# EAGLE board SparkFun_Analog_MEMS_Microphone_Breakout_SPH8878LR5H-1-Panel (EAGLE 9.6.2), part 1 of 7
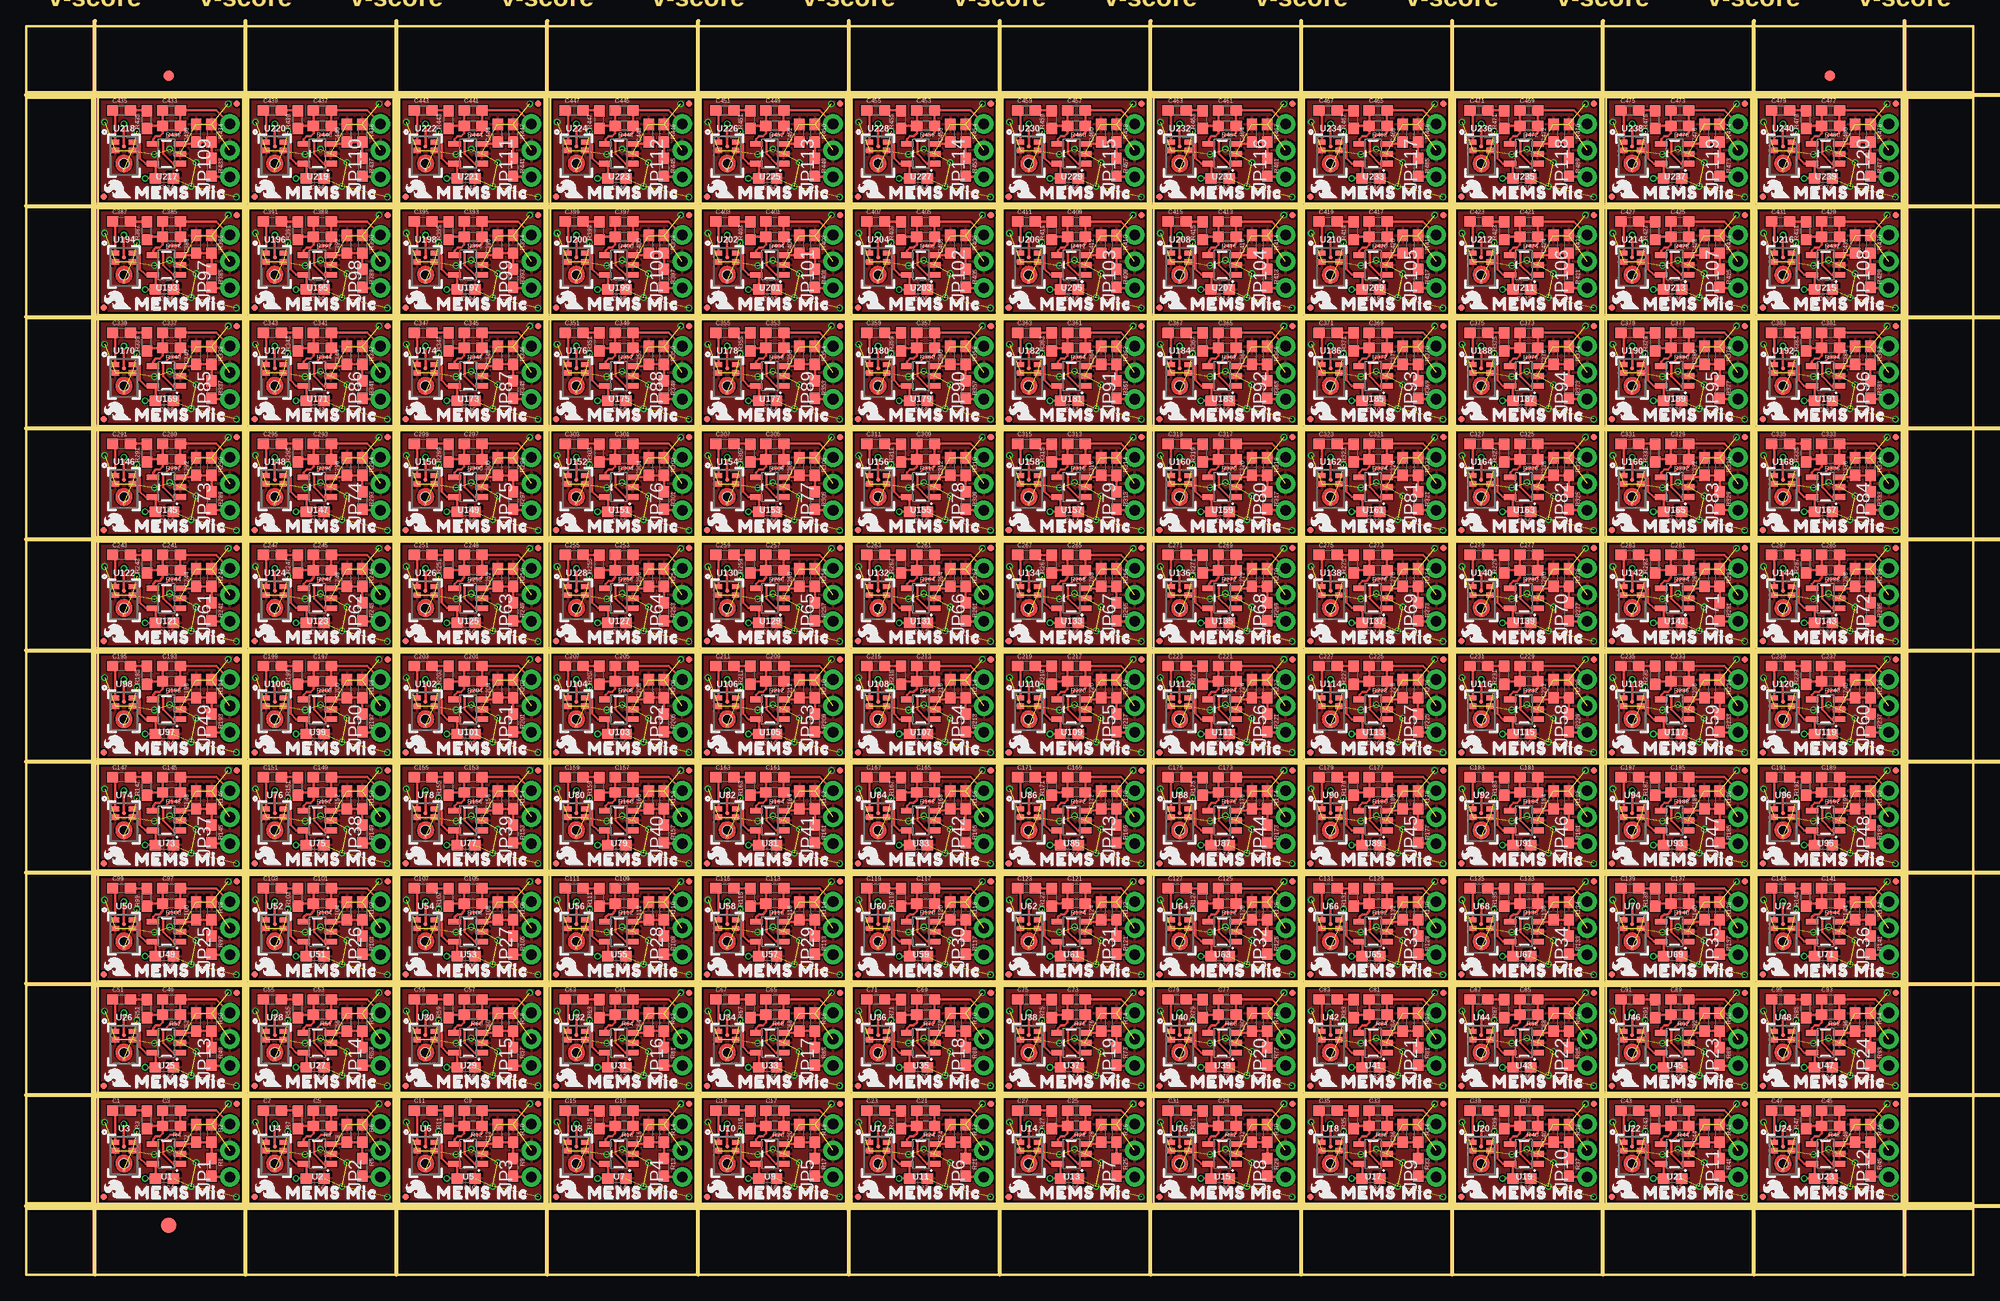
[diagram p0: board, top side]
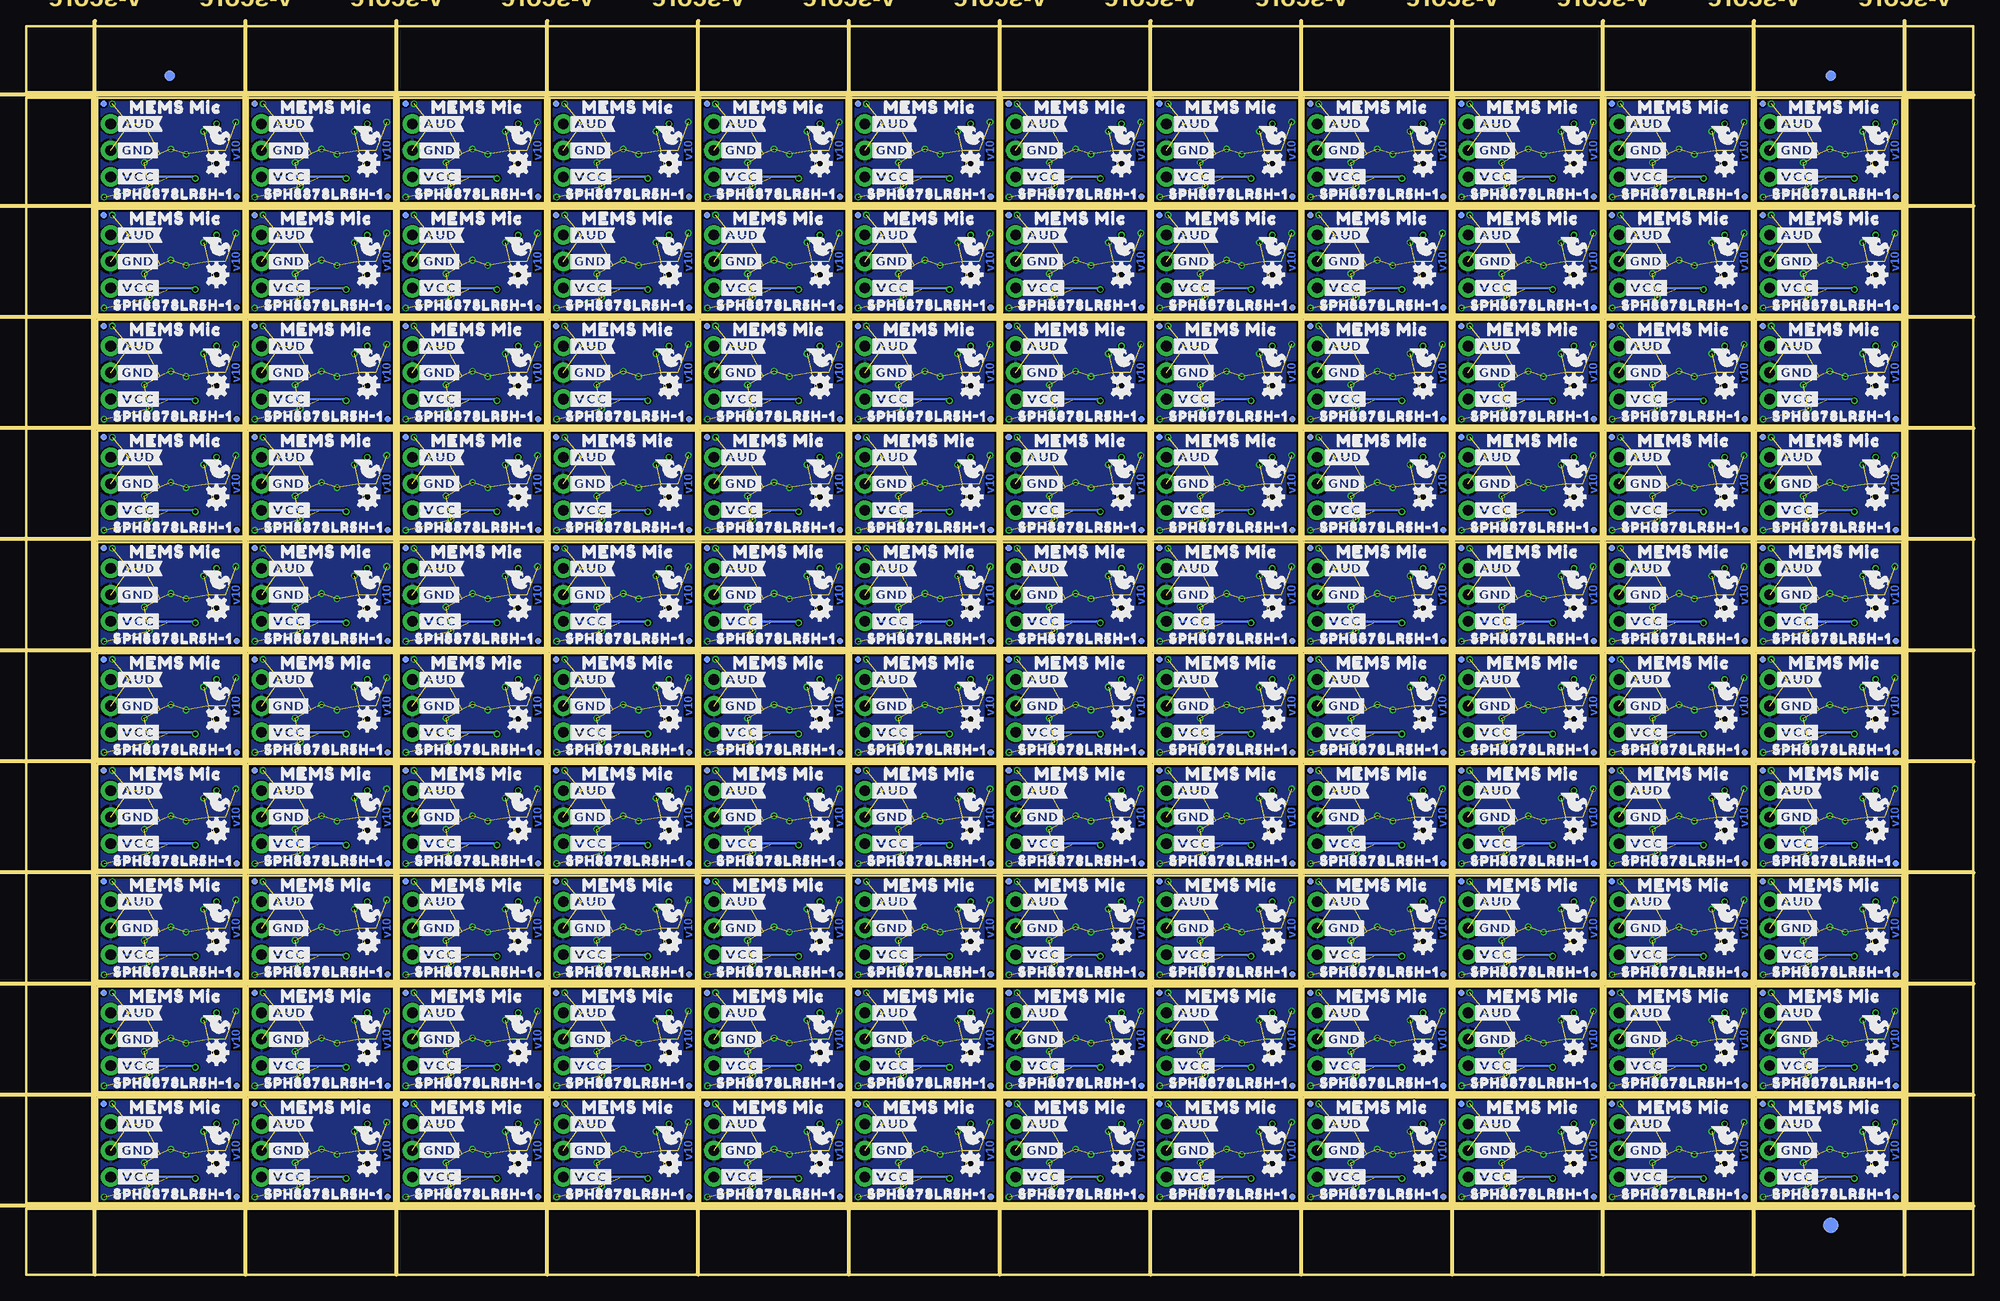
[diagram p1: board, bottom side, seen from below]

Size 186.94 x 119.89 mm. Coordinates in mm from the lower left corner, seen from the top.
Outline: 496 segments
Copper layers (1*16): Top 0.035mm / dielectric 1.5mm / Bottom 0.035mm
Design rules "SparkFun_Analog_MEMS_Microphone_Breakout_SPH8878LR5H-1": minimum track width 5mil, minimum drill 0.3mm, track to track 5mil, track to pad 5mil, pad to pad 5mil, via to via 5mil, smd to smd 5mil, copper to edge 7mil, drill to drill 7mil, minimum pad ring 5mil, minimum via ring 5mil, stop-mask expansion 2.5mil, vias tented up to drill 25mil, thermal gap 10mil
Milling: 24 lines

## Footprints (pad centres in the part's own frame; a part is rotated, then mirrored left to right if it is on the bottom)
0603 = smd 1.1 x 1: 1 -0.85,0; 2 0.85,0
FIDUCIAL-1X2 = smd 1 x 1: 1 0,0
FIDUCIAL-1.5X3 = smd 1.5 x 1.5: 1 0,0
FIDUCIAL-MICRO = smd 0.635 x 0.635: 1 0,0
1X03_NO_SILK = drill 1.016 pad 1.88: 1 0,0; 2 2.54,0; 3 5.08,0
TP_15TH = drill 0.381 pad 0.61: 1 0,0
SOT23-5 = smd 0.55 x 1.2: 1 -0.95,-1.3; 2 0,-1.3; 3 0.95,-1.3; 4 0.95,1.3; 5 -0.95,1.3
SPH8878LR5H-1 = smd 0.685 x 0.482: 1 -0.818,2.055; 5 0.818,2.055 | smd 0.685 x 0.523: 2 -0.818,1.252; 4 0.818,1.252 | smd 0.25 x 0.25: 3 -0.01,-0.66 | smd 0.4 x 0.4: 6 0,1.663 | hole 0.9: 0,0

## Placement (x,y rotation side)
C1  4.7uF  [0603]  9.17,15.77 0 top
C2  1.0uF  [0603]  16.33,13.59 90 top
C3  27pF  [0603]  13.97,15.77 0 top
C4  0.1uF  [0603]  13.28,9.25 180 top
C5  27pF  [0603]  28.45,15.77 0 top
C6  0.1uF  [0603]  27.76,9.25 180 top
C7  4.7uF  [0603]  23.65,15.77 0 top
C8  1.0uF  [0603]  30.81,13.59 90 top
C9  27pF  [0603]  42.93,15.77 0 top
C10  0.1uF  [0603]  42.24,9.25 180 top
C11  4.7uF  [0603]  38.13,15.77 0 top
C12  1.0uF  [0603]  45.29,13.59 90 top
C13  27pF  [0603]  57.4,15.77 0 top
C14  0.1uF  [0603]  56.72,9.25 180 top
C15  4.7uF  [0603]  52.6,15.77 0 top
C16  1.0uF  [0603]  59.77,13.59 90 top
C17  27pF  [0603]  71.88,15.77 0 top
C18  0.1uF  [0603]  71.2,9.25 180 top
C19  4.7uF  [0603]  67.08,15.77 0 top
C20  1.0uF  [0603]  74.24,13.59 90 top
C21  27pF  [0603]  86.36,15.77 0 top
C22  0.1uF  [0603]  85.67,9.25 180 top
C23  4.7uF  [0603]  81.56,15.77 0 top
C24  1.0uF  [0603]  88.72,13.59 90 top
C25  27pF  [0603]  100.84,15.77 0 top
C26  0.1uF  [0603]  100.15,9.25 180 top
C27  4.7uF  [0603]  96.04,15.77 0 top
C28  1.0uF  [0603]  103.2,13.59 90 top
C29  27pF  [0603]  115.32,15.77 0 top
C30  0.1uF  [0603]  114.63,9.25 180 top
C31  4.7uF  [0603]  110.52,15.77 0 top
C32  1.0uF  [0603]  117.68,13.59 90 top
C33  27pF  [0603]  129.79,15.77 0 top
C34  0.1uF  [0603]  129.11,9.25 180 top
C35  4.7uF  [0603]  124.99,15.77 0 top
C36  1.0uF  [0603]  132.16,13.59 90 top
C37  27pF  [0603]  144.27,15.77 0 top
C38  0.1uF  [0603]  143.59,9.25 180 top
C39  4.7uF  [0603]  139.47,15.77 0 top
C40  1.0uF  [0603]  146.63,13.59 90 top
C41  27pF  [0603]  158.75,15.77 0 top
C42  0.1uF  [0603]  158.06,9.25 180 top
C43  4.7uF  [0603]  153.95,15.77 0 top
C44  1.0uF  [0603]  161.11,13.59 90 top
C45  27pF  [0603]  173.23,15.77 0 top
C46  0.1uF  [0603]  172.54,9.25 180 top
C47  4.7uF  [0603]  168.43,15.77 0 top
C48  1.0uF  [0603]  175.59,13.59 90 top
C49  27pF  [0603]  13.97,26.44 0 top
C50  0.1uF  [0603]  13.28,19.91 180 top
C51  4.7uF  [0603]  9.17,26.44 0 top
C52  1.0uF  [0603]  16.33,24.26 90 top
C53  27pF  [0603]  28.45,26.44 0 top
C54  0.1uF  [0603]  27.76,19.91 180 top
C55  4.7uF  [0603]  23.65,26.44 0 top
C56  1.0uF  [0603]  30.81,24.26 90 top
C57  27pF  [0603]  42.93,26.44 0 top
C58  0.1uF  [0603]  42.24,19.91 180 top
C59  4.7uF  [0603]  38.13,26.44 0 top
C60  1.0uF  [0603]  45.29,24.26 90 top
C61  27pF  [0603]  57.4,26.44 0 top
C62  0.1uF  [0603]  56.72,19.91 180 top
C63  4.7uF  [0603]  52.6,26.44 0 top
C64  1.0uF  [0603]  59.77,24.26 90 top
C65  27pF  [0603]  71.88,26.44 0 top
C66  0.1uF  [0603]  71.2,19.91 180 top
C67  4.7uF  [0603]  67.08,26.44 0 top
C68  1.0uF  [0603]  74.24,24.26 90 top
C69  27pF  [0603]  86.36,26.44 0 top
C70  0.1uF  [0603]  85.67,19.91 180 top
C71  4.7uF  [0603]  81.56,26.44 0 top
C72  1.0uF  [0603]  88.72,24.26 90 top
C73  27pF  [0603]  100.84,26.44 0 top
C74  0.1uF  [0603]  100.15,19.91 180 top
C75  4.7uF  [0603]  96.04,26.44 0 top
C76  1.0uF  [0603]  103.2,24.26 90 top
C77  27pF  [0603]  115.32,26.44 0 top
C78  0.1uF  [0603]  114.63,19.91 180 top
C79  4.7uF  [0603]  110.52,26.44 0 top
C80  1.0uF  [0603]  117.68,24.26 90 top
C81  27pF  [0603]  129.79,26.44 0 top
C82  0.1uF  [0603]  129.11,19.91 180 top
C83  4.7uF  [0603]  124.99,26.44 0 top
C84  1.0uF  [0603]  132.16,24.26 90 top
C85  27pF  [0603]  144.27,26.44 0 top
C86  0.1uF  [0603]  143.59,19.91 180 top
C87  4.7uF  [0603]  139.47,26.44 0 top
C88  1.0uF  [0603]  146.63,24.26 90 top
C89  27pF  [0603]  158.75,26.44 0 top
C90  0.1uF  [0603]  158.06,19.91 180 top
C91  4.7uF  [0603]  153.95,26.44 0 top
C92  1.0uF  [0603]  161.11,24.26 90 top
C93  27pF  [0603]  173.23,26.44 0 top
C94  0.1uF  [0603]  172.54,19.91 180 top
C95  4.7uF  [0603]  168.43,26.44 0 top
C96  1.0uF  [0603]  175.59,24.26 90 top
C97  27pF  [0603]  13.97,37.11 0 top
C98  0.1uF  [0603]  13.28,30.58 180 top
C99  4.7uF  [0603]  9.17,37.11 0 top
C100  1.0uF  [0603]  16.33,34.92 90 top
C101  27pF  [0603]  28.45,37.11 0 top
C102  0.1uF  [0603]  27.76,30.58 180 top
C103  4.7uF  [0603]  23.65,37.11 0 top
C104  1.0uF  [0603]  30.81,34.92 90 top
C105  27pF  [0603]  42.93,37.11 0 top
C106  0.1uF  [0603]  42.24,30.58 180 top
C107  4.7uF  [0603]  38.13,37.11 0 top
C108  1.0uF  [0603]  45.29,34.92 90 top
C109  27pF  [0603]  57.4,37.11 0 top
C110  0.1uF  [0603]  56.72,30.58 180 top
C111  4.7uF  [0603]  52.6,37.11 0 top
C112  1.0uF  [0603]  59.77,34.92 90 top
C113  27pF  [0603]  71.88,37.11 0 top
C114  0.1uF  [0603]  71.2,30.58 180 top
C115  4.7uF  [0603]  67.08,37.11 0 top
C116  1.0uF  [0603]  74.24,34.92 90 top
C117  27pF  [0603]  86.36,37.11 0 top
C118  0.1uF  [0603]  85.67,30.58 180 top
C119  4.7uF  [0603]  81.56,37.11 0 top
C120  1.0uF  [0603]  88.72,34.92 90 top
C121  27pF  [0603]  100.84,37.11 0 top
C122  0.1uF  [0603]  100.15,30.58 180 top
C123  4.7uF  [0603]  96.04,37.11 0 top
C124  1.0uF  [0603]  103.2,34.92 90 top
C125  27pF  [0603]  115.32,37.11 0 top
C126  0.1uF  [0603]  114.63,30.58 180 top
C127  4.7uF  [0603]  110.52,37.11 0 top
C128  1.0uF  [0603]  117.68,34.92 90 top
C129  27pF  [0603]  129.79,37.11 0 top
C130  0.1uF  [0603]  129.11,30.58 180 top
C131  4.7uF  [0603]  124.99,37.11 0 top
C132  1.0uF  [0603]  132.16,34.92 90 top
C133  27pF  [0603]  144.27,37.11 0 top
C134  0.1uF  [0603]  143.59,30.58 180 top
C135  4.7uF  [0603]  139.47,37.11 0 top
C136  1.0uF  [0603]  146.63,34.92 90 top
C137  27pF  [0603]  158.75,37.11 0 top
C138  0.1uF  [0603]  158.06,30.58 180 top
C139  4.7uF  [0603]  153.95,37.11 0 top
C140  1.0uF  [0603]  161.11,34.92 90 top
C141  27pF  [0603]  173.23,37.11 0 top
C142  0.1uF  [0603]  172.54,30.58 180 top
C143  4.7uF  [0603]  168.43,37.11 0 top
C144  1.0uF  [0603]  175.59,34.92 90 top
C145  27pF  [0603]  13.97,47.78 0 top
C146  0.1uF  [0603]  13.28,41.25 180 top
C147  4.7uF  [0603]  9.17,47.78 0 top
C148  1.0uF  [0603]  16.33,45.59 90 top
C149  27pF  [0603]  28.45,47.78 0 top
C150  0.1uF  [0603]  27.76,41.25 180 top
C151  4.7uF  [0603]  23.65,47.78 0 top
C152  1.0uF  [0603]  30.81,45.59 90 top
C153  27pF  [0603]  42.93,47.78 0 top
C154  0.1uF  [0603]  42.24,41.25 180 top
C155  4.7uF  [0603]  38.13,47.78 0 top
C156  1.0uF  [0603]  45.29,45.59 90 top
C157  27pF  [0603]  57.4,47.78 0 top
C158  0.1uF  [0603]  56.72,41.25 180 top
C159  4.7uF  [0603]  52.6,47.78 0 top
C160  1.0uF  [0603]  59.77,45.59 90 top
C161  27pF  [0603]  71.88,47.78 0 top
C162  0.1uF  [0603]  71.2,41.25 180 top
C163  4.7uF  [0603]  67.08,47.78 0 top
C164  1.0uF  [0603]  74.24,45.59 90 top
C165  27pF  [0603]  86.36,47.78 0 top
C166  0.1uF  [0603]  85.67,41.25 180 top
C167  4.7uF  [0603]  81.56,47.78 0 top
C168  1.0uF  [0603]  88.72,45.59 90 top
C169  27pF  [0603]  100.84,47.78 0 top
C170  0.1uF  [0603]  100.15,41.25 180 top
C171  4.7uF  [0603]  96.04,47.78 0 top
C172  1.0uF  [0603]  103.2,45.59 90 top
C173  27pF  [0603]  115.32,47.78 0 top
C174  0.1uF  [0603]  114.63,41.25 180 top
C175  4.7uF  [0603]  110.52,47.78 0 top
C176  1.0uF  [0603]  117.68,45.59 90 top
C177  27pF  [0603]  129.79,47.78 0 top
C178  0.1uF  [0603]  129.11,41.25 180 top
C179  4.7uF  [0603]  124.99,47.78 0 top
C180  1.0uF  [0603]  132.16,45.59 90 top
C181  27pF  [0603]  144.27,47.78 0 top
C182  0.1uF  [0603]  143.59,41.25 180 top
C183  4.7uF  [0603]  139.47,47.78 0 top
C184  1.0uF  [0603]  146.63,45.59 90 top
C185  27pF  [0603]  158.75,47.78 0 top
C186  0.1uF  [0603]  158.06,41.25 180 top
C187  4.7uF  [0603]  153.95,47.78 0 top
C188  1.0uF  [0603]  161.11,45.59 90 top
C189  27pF  [0603]  173.23,47.78 0 top
C190  0.1uF  [0603]  172.54,41.25 180 top
C191  4.7uF  [0603]  168.43,47.78 0 top
C192  1.0uF  [0603]  175.59,45.59 90 top
C193  27pF  [0603]  13.97,58.45 0 top
C194  0.1uF  [0603]  13.28,51.92 180 top
C195  4.7uF  [0603]  9.17,58.45 0 top
C196  1.0uF  [0603]  16.33,56.26 90 top
C197  27pF  [0603]  28.45,58.45 0 top
C198  0.1uF  [0603]  27.76,51.92 180 top
C199  4.7uF  [0603]  23.65,58.45 0 top
C200  1.0uF  [0603]  30.81,56.26 90 top
C201  27pF  [0603]  42.93,58.45 0 top
C202  0.1uF  [0603]  42.24,51.92 180 top
C203  4.7uF  [0603]  38.13,58.45 0 top
C204  1.0uF  [0603]  45.29,56.26 90 top
C205  27pF  [0603]  57.4,58.45 0 top
C206  0.1uF  [0603]  56.72,51.92 180 top
C207  4.7uF  [0603]  52.6,58.45 0 top
C208  1.0uF  [0603]  59.77,56.26 90 top
C209  27pF  [0603]  71.88,58.45 0 top
C210  0.1uF  [0603]  71.2,51.92 180 top
C211  4.7uF  [0603]  67.08,58.45 0 top
C212  1.0uF  [0603]  74.24,56.26 90 top
C213  27pF  [0603]  86.36,58.45 0 top
C214  0.1uF  [0603]  85.67,51.92 180 top
C215  4.7uF  [0603]  81.56,58.45 0 top
C216  1.0uF  [0603]  88.72,56.26 90 top
C217  27pF  [0603]  100.84,58.45 0 top
C218  0.1uF  [0603]  100.15,51.92 180 top
C219  4.7uF  [0603]  96.04,58.45 0 top
C220  1.0uF  [0603]  103.2,56.26 90 top
C221  27pF  [0603]  115.32,58.45 0 top
C222  0.1uF  [0603]  114.63,51.92 180 top
C223  4.7uF  [0603]  110.52,58.45 0 top
C224  1.0uF  [0603]  117.68,56.26 90 top
C225  27pF  [0603]  129.79,58.45 0 top
C226  0.1uF  [0603]  129.11,51.92 180 top
C227  4.7uF  [0603]  124.99,58.45 0 top
C228  1.0uF  [0603]  132.16,56.26 90 top
C229  27pF  [0603]  144.27,58.45 0 top
C230  0.1uF  [0603]  143.59,51.92 180 top
C231  4.7uF  [0603]  139.47,58.45 0 top
C232  1.0uF  [0603]  146.63,56.26 90 top
C233  27pF  [0603]  158.75,58.45 0 top
C234  0.1uF  [0603]  158.06,51.92 180 top
C235  4.7uF  [0603]  153.95,58.45 0 top
C236  1.0uF  [0603]  161.11,56.26 90 top
C237  27pF  [0603]  173.23,58.45 0 top
C238  0.1uF  [0603]  172.54,51.92 180 top
C239  4.7uF  [0603]  168.43,58.45 0 top
C240  1.0uF  [0603]  175.59,56.26 90 top
C241  27pF  [0603]  13.97,69.11 0 top
C242  0.1uF  [0603]  13.28,62.59 180 top
C243  4.7uF  [0603]  9.17,69.11 0 top
C244  1.0uF  [0603]  16.33,66.93 90 top
C245  27pF  [0603]  28.45,69.11 0 top
C246  0.1uF  [0603]  27.76,62.59 180 top
C247  4.7uF  [0603]  23.65,69.11 0 top
C248  1.0uF  [0603]  30.81,66.93 90 top
C249  27pF  [0603]  42.93,69.11 0 top
C250  0.1uF  [0603]  42.24,62.59 180 top
C251  4.7uF  [0603]  38.13,69.11 0 top
C252  1.0uF  [0603]  45.29,66.93 90 top
C253  27pF  [0603]  57.4,69.11 0 top
C254  0.1uF  [0603]  56.72,62.59 180 top
C255  4.7uF  [0603]  52.6,69.11 0 top
C256  1.0uF  [0603]  59.77,66.93 90 top
C257  27pF  [0603]  71.88,69.11 0 top
C258  0.1uF  [0603]  71.2,62.59 180 top
C259  4.7uF  [0603]  67.08,69.11 0 top
C260  1.0uF  [0603]  74.24,66.93 90 top
C261  27pF  [0603]  86.36,69.11 0 top
C262  0.1uF  [0603]  85.67,62.59 180 top
C263  4.7uF  [0603]  81.56,69.11 0 top
C264  1.0uF  [0603]  88.72,66.93 90 top
C265  27pF  [0603]  100.84,69.11 0 top
C266  0.1uF  [0603]  100.15,62.59 180 top
C267  4.7uF  [0603]  96.04,69.11 0 top
C268  1.0uF  [0603]  103.2,66.93 90 top
C269  27pF  [0603]  115.32,69.11 0 top
C270  0.1uF  [0603]  114.63,62.59 180 top
C271  4.7uF  [0603]  110.52,69.11 0 top
C272  1.0uF  [0603]  117.68,66.93 90 top
C273  27pF  [0603]  129.79,69.11 0 top
C274  0.1uF  [0603]  129.11,62.59 180 top
C275  4.7uF  [0603]  124.99,69.11 0 top
C276  1.0uF  [0603]  132.16,66.93 90 top
C277  27pF  [0603]  144.27,69.11 0 top
C278  0.1uF  [0603]  143.59,62.59 180 top
C279  4.7uF  [0603]  139.47,69.11 0 top
C280  1.0uF  [0603]  146.63,66.93 90 top
C281  27pF  [0603]  158.75,69.11 0 top
C282  0.1uF  [0603]  158.06,62.59 180 top
C283  4.7uF  [0603]  153.95,69.11 0 top
C284  1.0uF  [0603]  161.11,66.93 90 top
C285  27pF  [0603]  173.23,69.11 0 top
C286  0.1uF  [0603]  172.54,62.59 180 top
C287  4.7uF  [0603]  168.43,69.11 0 top
C288  1.0uF  [0603]  175.59,66.93 90 top
C289  27pF  [0603]  13.97,79.78 0 top
C290  0.1uF  [0603]  13.28,73.25 180 top
C291  4.7uF  [0603]  9.17,79.78 0 top
C292  1.0uF  [0603]  16.33,77.6 90 top
C293  27pF  [0603]  28.45,79.78 0 top
C294  0.1uF  [0603]  27.76,73.25 180 top
C295  4.7uF  [0603]  23.65,79.78 0 top
C296  1.0uF  [0603]  30.81,77.6 90 top
C297  27pF  [0603]  42.93,79.78 0 top
C298  0.1uF  [0603]  42.24,73.25 180 top
C299  4.7uF  [0603]  38.13,79.78 0 top
C300  1.0uF  [0603]  45.29,77.6 90 top
C301  27pF  [0603]  57.4,79.78 0 top
C302  0.1uF  [0603]  56.72,73.25 180 top
C303  4.7uF  [0603]  52.6,79.78 0 top
C304  1.0uF  [0603]  59.77,77.6 90 top
C305  27pF  [0603]  71.88,79.78 0 top
C306  0.1uF  [0603]  71.2,73.25 180 top
C307  4.7uF  [0603]  67.08,79.78 0 top
C308  1.0uF  [0603]  74.24,77.6 90 top
C309  27pF  [0603]  86.36,79.78 0 top
C310  0.1uF  [0603]  85.67,73.25 180 top
C311  4.7uF  [0603]  81.56,79.78 0 top
C312  1.0uF  [0603]  88.72,77.6 90 top
C313  27pF  [0603]  100.84,79.78 0 top
C314  0.1uF  [0603]  100.15,73.25 180 top
C315  4.7uF  [0603]  96.04,79.78 0 top
C316  1.0uF  [0603]  103.2,77.6 90 top
C317  27pF  [0603]  115.32,79.78 0 top
C318  0.1uF  [0603]  114.63,73.25 180 top
C319  4.7uF  [0603]  110.52,79.78 0 top
C320  1.0uF  [0603]  117.68,77.6 90 top
C321  27pF  [0603]  129.79,79.78 0 top
C322  0.1uF  [0603]  129.11,73.25 180 top
C323  4.7uF  [0603]  124.99,79.78 0 top
C324  1.0uF  [0603]  132.16,77.6 90 top
C325  27pF  [0603]  144.27,79.78 0 top
C326  0.1uF  [0603]  143.59,73.25 180 top
C327  4.7uF  [0603]  139.47,79.78 0 top
C328  1.0uF  [0603]  146.63,77.6 90 top
C329  27pF  [0603]  158.75,79.78 0 top
C330  0.1uF  [0603]  158.06,73.25 180 top
C331  4.7uF  [0603]  153.95,79.78 0 top
C332  1.0uF  [0603]  161.11,77.6 90 top
C333  27pF  [0603]  173.23,79.78 0 top
C334  0.1uF  [0603]  172.54,73.25 180 top
C335  4.7uF  [0603]  168.43,79.78 0 top
C336  1.0uF  [0603]  175.59,77.6 90 top
C337  27pF  [0603]  13.97,90.45 0 top
C338  0.1uF  [0603]  13.28,83.92 180 top
C339  4.7uF  [0603]  9.17,90.45 0 top
C340  1.0uF  [0603]  16.33,88.27 90 top
C341  27pF  [0603]  28.45,90.45 0 top
C342  0.1uF  [0603]  27.76,83.92 180 top
C343  4.7uF  [0603]  23.65,90.45 0 top
C344  1.0uF  [0603]  30.81,88.27 90 top
C345  27pF  [0603]  42.93,90.45 0 top
C346  0.1uF  [0603]  42.24,83.92 180 top
C347  4.7uF  [0603]  38.13,90.45 0 top
C348  1.0uF  [0603]  45.29,88.27 90 top
C349  27pF  [0603]  57.4,90.45 0 top
C350  0.1uF  [0603]  56.72,83.92 180 top
C351  4.7uF  [0603]  52.6,90.45 0 top
C352  1.0uF  [0603]  59.77,88.27 90 top
C353  27pF  [0603]  71.88,90.45 0 top
C354  0.1uF  [0603]  71.2,83.92 180 top
C355  4.7uF  [0603]  67.08,90.45 0 top
C356  1.0uF  [0603]  74.24,88.27 90 top
C357  27pF  [0603]  86.36,90.45 0 top
C358  0.1uF  [0603]  85.67,83.92 180 top
C359  4.7uF  [0603]  81.56,90.45 0 top
C360  1.0uF  [0603]  88.72,88.27 90 top
C361  27pF  [0603]  100.84,90.45 0 top
C362  0.1uF  [0603]  100.15,83.92 180 top
C363  4.7uF  [0603]  96.04,90.45 0 top
C364  1.0uF  [0603]  103.2,88.27 90 top
C365  27pF  [0603]  115.32,90.45 0 top
C366  0.1uF  [0603]  114.63,83.92 180 top
C367  4.7uF  [0603]  110.52,90.45 0 top
C368  1.0uF  [0603]  117.68,88.27 90 top
C369  27pF  [0603]  129.79,90.45 0 top
C370  0.1uF  [0603]  129.11,83.92 180 top
C371  4.7uF  [0603]  124.99,90.45 0 top
C372  1.0uF  [0603]  132.16,88.27 90 top
C373  27pF  [0603]  144.27,90.45 0 top
C374  0.1uF  [0603]  143.59,83.92 180 top
C375  4.7uF  [0603]  139.47,90.45 0 top
C376  1.0uF  [0603]  146.63,88.27 90 top
C377  27pF  [0603]  158.75,90.45 0 top
C378  0.1uF  [0603]  158.06,83.92 180 top
C379  4.7uF  [0603]  153.95,90.45 0 top
C380  1.0uF  [0603]  161.11,88.27 90 top
C381  27pF  [0603]  173.23,90.45 0 top
C382  0.1uF  [0603]  172.54,83.92 180 top
C383  4.7uF  [0603]  168.43,90.45 0 top
C384  1.0uF  [0603]  175.59,88.27 90 top
C385  27pF  [0603]  13.97,101.12 0 top
C386  0.1uF  [0603]  13.28,94.59 180 top
C387  4.7uF  [0603]  9.17,101.12 0 top
C388  1.0uF  [0603]  16.33,98.93 90 top
C389  27pF  [0603]  28.45,101.12 0 top
C390  0.1uF  [0603]  27.76,94.59 180 top
C391  4.7uF  [0603]  23.65,101.12 0 top
C392  1.0uF  [0603]  30.81,98.93 90 top
C393  27pF  [0603]  42.93,101.12 0 top
C394  0.1uF  [0603]  42.24,94.59 180 top
C395  4.7uF  [0603]  38.13,101.12 0 top
C396  1.0uF  [0603]  45.29,98.93 90 top
C397  27pF  [0603]  57.4,101.12 0 top
C398  0.1uF  [0603]  56.72,94.59 180 top
C399  4.7uF  [0603]  52.6,101.12 0 top
C400  1.0uF  [0603]  59.77,98.93 90 top
C401  27pF  [0603]  71.88,101.12 0 top
C402  0.1uF  [0603]  71.2,94.59 180 top
C403  4.7uF  [0603]  67.08,101.12 0 top
C404  1.0uF  [0603]  74.24,98.93 90 top
C405  27pF  [0603]  86.36,101.12 0 top
C406  0.1uF  [0603]  85.67,94.59 180 top
C407  4.7uF  [0603]  81.56,101.12 0 top
C408  1.0uF  [0603]  88.72,98.93 90 top
C409  27pF  [0603]  100.84,101.12 0 top
C410  0.1uF  [0603]  100.15,94.59 180 top
C411  4.7uF  [0603]  96.04,101.12 0 top
C412  1.0uF  [0603]  103.2,98.93 90 top
C413  27pF  [0603]  115.32,101.12 0 top
C414  0.1uF  [0603]  114.63,94.59 180 top
C415  4.7uF  [0603]  110.52,101.12 0 top
C416  1.0uF  [0603]  117.68,98.93 90 top
C417  27pF  [0603]  129.79,101.12 0 top
C418  0.1uF  [0603]  129.11,94.59 180 top
C419  4.7uF  [0603]  124.99,101.12 0 top
C420  1.0uF  [0603]  132.16,98.93 90 top
C421  27pF  [0603]  144.27,101.12 0 top
C422  0.1uF  [0603]  143.59,94.59 180 top
C423  4.7uF  [0603]  139.47,101.12 0 top
C424  1.0uF  [0603]  146.63,98.93 90 top
C425  27pF  [0603]  158.75,101.12 0 top
C426  0.1uF  [0603]  158.06,94.59 180 top
C427  4.7uF  [0603]  153.95,101.12 0 top
C428  1.0uF  [0603]  161.11,98.93 90 top
C429  27pF  [0603]  173.23,101.12 0 top
C430  0.1uF  [0603]  172.54,94.59 180 top
C431  4.7uF  [0603]  168.43,101.12 0 top
C432  1.0uF  [0603]  175.59,98.93 90 top
C433  27pF  [0603]  13.97,111.79 0 top
C434  0.1uF  [0603]  13.28,105.26 180 top
C435  4.7uF  [0603]  9.17,111.79 0 top
C436  1.0uF  [0603]  16.33,109.6 90 top
C437  27pF  [0603]  28.45,111.79 0 top
C438  0.1uF  [0603]  27.76,105.26 180 top
C439  4.7uF  [0603]  23.65,111.79 0 top
C440  1.0uF  [0603]  30.81,109.6 90 top
C441  27pF  [0603]  42.93,111.79 0 top
C442  0.1uF  [0603]  42.24,105.26 180 top
C443  4.7uF  [0603]  38.13,111.79 0 top
C444  1.0uF  [0603]  45.29,109.6 90 top
C445  27pF  [0603]  57.4,111.79 0 top
C446  0.1uF  [0603]  56.72,105.26 180 top
C447  4.7uF  [0603]  52.6,111.79 0 top
C448  1.0uF  [0603]  59.77,109.6 90 top
C449  27pF  [0603]  71.88,111.79 0 top
C450  0.1uF  [0603]  71.2,105.26 180 top
C451  4.7uF  [0603]  67.08,111.79 0 top
C452  1.0uF  [0603]  74.24,109.6 90 top
C453  27pF  [0603]  86.36,111.79 0 top
C454  0.1uF  [0603]  85.67,105.26 180 top
C455  4.7uF  [0603]  81.56,111.79 0 top
C456  1.0uF  [0603]  88.72,109.6 90 top
C457  27pF  [0603]  100.84,111.79 0 top
C458  0.1uF  [0603]  100.15,105.26 180 top
C459  4.7uF  [0603]  96.04,111.79 0 top
C460  1.0uF  [0603]  103.2,109.6 90 top
C461  27pF  [0603]  115.32,111.79 0 top
C462  0.1uF  [0603]  114.63,105.26 180 top
C463  4.7uF  [0603]  110.52,111.79 0 top
C464  1.0uF  [0603]  117.68,109.6 90 top
C465  27pF  [0603]  129.79,111.79 0 top
C466  0.1uF  [0603]  129.11,105.26 180 top
C467  4.7uF  [0603]  124.99,111.79 0 top
C468  1.0uF  [0603]  132.16,109.6 90 top
C469  27pF  [0603]  144.27,111.79 0 top
C470  0.1uF  [0603]  143.59,105.26 180 top
C471  4.7uF  [0603]  139.47,111.79 0 top
C472  1.0uF  [0603]  146.63,109.6 90 top
C473  27pF  [0603]  158.75,111.79 0 top
C474  0.1uF  [0603]  158.06,105.26 180 top
C475  4.7uF  [0603]  153.95,111.79 0 top
C476  1.0uF  [0603]  161.11,109.6 90 top
C477  27pF  [0603]  173.23,111.79 0 top
C478  0.1uF  [0603]  172.54,105.26 180 top
C479  4.7uF  [0603]  168.43,111.79 0 top
C480  1.0uF  [0603]  175.59,109.6 90 top
E$1  [FIDUCIAL-1X2]  13.72,115.13 0 top
E$2  [FIDUCIAL-1X2]  13.72,115.13 0 bottom
E$3  [FIDUCIAL-1X2]  173.16,115.13 0 top
E$4  [FIDUCIAL-1X2]  173.16,115.13 0 bottom
E$5  [FIDUCIAL-1.5X3]  13.72,4.76 0 top
E$6  [FIDUCIAL-1.5X3]  13.72,4.76 0 bottom
FD1  FIDUCIALUFIDUCIAL  [FIDUCIAL-MICRO]  20.22,16.41 0 top
FD2  FIDUCIALUFIDUCIAL  [FIDUCIAL-MICRO]  20.22,16.41 0 bottom
FD3  FIDUCIALUFIDUCIAL  [FIDUCIAL-MICRO]  7.47,7.49 0 top
FD4  FIDUCIALUFIDUCIAL  [FIDUCIAL-MICRO]  7.47,7.49 0 bottom
FD5  FIDUCIALUFIDUCIAL  [FIDUCIAL-MICRO]  34.7,16.41 0 top
FD6  FIDUCIALUFIDUCIAL  [FIDUCIAL-MICRO]  34.7,16.41 0 bottom
FD7  FIDUCIALUFIDUCIAL  [FIDUCIAL-MICRO]  21.95,7.49 0 top
FD8  FIDUCIALUFIDUCIAL  [FIDUCIAL-MICRO]  21.95,7.49 0 bottom
FD9  FIDUCIALUFIDUCIAL  [FIDUCIAL-MICRO]  49.17,16.41 0 top
FD10  FIDUCIALUFIDUCIAL  [FIDUCIAL-MICRO]  49.17,16.41 0 bottom
FD11  FIDUCIALUFIDUCIAL  [FIDUCIAL-MICRO]  36.42,7.49 0 top
FD12  FIDUCIALUFIDUCIAL  [FIDUCIAL-MICRO]  36.42,7.49 0 bottom
FD13  FIDUCIALUFIDUCIAL  [FIDUCIAL-MICRO]  63.65,16.41 0 top
FD14  FIDUCIALUFIDUCIAL  [FIDUCIAL-MICRO]  63.65,16.41 0 bottom
FD15  FIDUCIALUFIDUCIAL  [FIDUCIAL-MICRO]  50.9,7.49 0 top
FD16  FIDUCIALUFIDUCIAL  [FIDUCIAL-MICRO]  50.9,7.49 0 bottom
FD17  FIDUCIALUFIDUCIAL  [FIDUCIAL-MICRO]  78.13,16.41 0 top
FD18  FIDUCIALUFIDUCIAL  [FIDUCIAL-MICRO]  78.13,16.41 0 bottom
FD19  FIDUCIALUFIDUCIAL  [FIDUCIAL-MICRO]  65.38,7.49 0 top
FD20  FIDUCIALUFIDUCIAL  [FIDUCIAL-MICRO]  65.38,7.49 0 bottom
FD21  FIDUCIALUFIDUCIAL  [FIDUCIAL-MICRO]  92.61,16.41 0 top
FD22  FIDUCIALUFIDUCIAL  [FIDUCIAL-MICRO]  92.61,16.41 0 bottom
FD23  FIDUCIALUFIDUCIAL  [FIDUCIAL-MICRO]  79.86,7.49 0 top
FD24  FIDUCIALUFIDUCIAL  [FIDUCIAL-MICRO]  79.86,7.49 0 bottom
FD25  FIDUCIALUFIDUCIAL  [FIDUCIAL-MICRO]  107.09,16.41 0 top
FD26  FIDUCIALUFIDUCIAL  [FIDUCIAL-MICRO]  107.09,16.41 0 bottom
FD27  FIDUCIALUFIDUCIAL  [FIDUCIAL-MICRO]  94.34,7.49 0 top
FD28  FIDUCIALUFIDUCIAL  [FIDUCIAL-MICRO]  94.34,7.49 0 bottom
FD29  FIDUCIALUFIDUCIAL  [FIDUCIAL-MICRO]  121.56,16.41 0 top
FD30  FIDUCIALUFIDUCIAL  [FIDUCIAL-MICRO]  121.56,16.41 0 bottom
FD31  FIDUCIALUFIDUCIAL  [FIDUCIAL-MICRO]  108.81,7.49 0 top
FD32  FIDUCIALUFIDUCIAL  [FIDUCIAL-MICRO]  108.81,7.49 0 bottom
FD33  FIDUCIALUFIDUCIAL  [FIDUCIAL-MICRO]  136.04,16.41 0 top
FD34  FIDUCIALUFIDUCIAL  [FIDUCIAL-MICRO]  136.04,16.41 0 bottom
FD35  FIDUCIALUFIDUCIAL  [FIDUCIAL-MICRO]  123.29,7.49 0 top
FD36  FIDUCIALUFIDUCIAL  [FIDUCIAL-MICRO]  123.29,7.49 0 bottom
FD37  FIDUCIALUFIDUCIAL  [FIDUCIAL-MICRO]  150.52,16.41 0 top
FD38  FIDUCIALUFIDUCIAL  [FIDUCIAL-MICRO]  150.52,16.41 0 bottom
FD39  FIDUCIALUFIDUCIAL  [FIDUCIAL-MICRO]  137.77,7.49 0 top
FD40  FIDUCIALUFIDUCIAL  [FIDUCIAL-MICRO]  137.77,7.49 0 bottom
FD41  FIDUCIALUFIDUCIAL  [FIDUCIAL-MICRO]  165,16.41 0 top
FD42  FIDUCIALUFIDUCIAL  [FIDUCIAL-MICRO]  165,16.41 0 bottom
FD43  FIDUCIALUFIDUCIAL  [FIDUCIAL-MICRO]  152.25,7.49 0 top
FD44  FIDUCIALUFIDUCIAL  [FIDUCIAL-MICRO]  152.25,7.49 0 bottom
FD45  FIDUCIALUFIDUCIAL  [FIDUCIAL-MICRO]  179.48,16.41 0 top
FD46  FIDUCIALUFIDUCIAL  [FIDUCIAL-MICRO]  179.48,16.41 0 bottom
FD47  FIDUCIALUFIDUCIAL  [FIDUCIAL-MICRO]  166.73,7.49 0 top
FD48  FIDUCIALUFIDUCIAL  [FIDUCIAL-MICRO]  166.73,7.49 0 bottom
FD49  FIDUCIALUFIDUCIAL  [FIDUCIAL-MICRO]  20.22,27.08 0 top
FD50  FIDUCIALUFIDUCIAL  [FIDUCIAL-MICRO]  20.22,27.08 0 bottom
FD51  FIDUCIALUFIDUCIAL  [FIDUCIAL-MICRO]  7.47,18.16 0 top
FD52  FIDUCIALUFIDUCIAL  [FIDUCIAL-MICRO]  7.47,18.16 0 bottom
FD53  FIDUCIALUFIDUCIAL  [FIDUCIAL-MICRO]  34.7,27.08 0 top
FD54  FIDUCIALUFIDUCIAL  [FIDUCIAL-MICRO]  34.7,27.08 0 bottom
FD55  FIDUCIALUFIDUCIAL  [FIDUCIAL-MICRO]  21.95,18.16 0 top
FD56  FIDUCIALUFIDUCIAL  [FIDUCIAL-MICRO]  21.95,18.16 0 bottom
FD57  FIDUCIALUFIDUCIAL  [FIDUCIAL-MICRO]  49.17,27.08 0 top
FD58  FIDUCIALUFIDUCIAL  [FIDUCIAL-MICRO]  49.17,27.08 0 bottom
FD59  FIDUCIALUFIDUCIAL  [FIDUCIAL-MICRO]  36.42,18.16 0 top
FD60  FIDUCIALUFIDUCIAL  [FIDUCIAL-MICRO]  36.42,18.16 0 bottom
FD61  FIDUCIALUFIDUCIAL  [FIDUCIAL-MICRO]  63.65,27.08 0 top
FD62  FIDUCIALUFIDUCIAL  [FIDUCIAL-MICRO]  63.65,27.08 0 bottom
FD63  FIDUCIALUFIDUCIAL  [FIDUCIAL-MICRO]  50.9,18.16 0 top
FD64  FIDUCIALUFIDUCIAL  [FIDUCIAL-MICRO]  50.9,18.16 0 bottom
FD65  FIDUCIALUFIDUCIAL  [FIDUCIAL-MICRO]  78.13,27.08 0 top
FD66  FIDUCIALUFIDUCIAL  [FIDUCIAL-MICRO]  78.13,27.08 0 bottom
FD67  FIDUCIALUFIDUCIAL  [FIDUCIAL-MICRO]  65.38,18.16 0 top
FD68  FIDUCIALUFIDUCIAL  [FIDUCIAL-MICRO]  65.38,18.16 0 bottom
FD69  FIDUCIALUFIDUCIAL  [FIDUCIAL-MICRO]  92.61,27.08 0 top
FD70  FIDUCIALUFIDUCIAL  [FIDUCIAL-MICRO]  92.61,27.08 0 bottom
FD71  FIDUCIALUFIDUCIAL  [FIDUCIAL-MICRO]  79.86,18.16 0 top
FD72  FIDUCIALUFIDUCIAL  [FIDUCIAL-MICRO]  79.86,18.16 0 bottom
FD73  FIDUCIALUFIDUCIAL  [FIDUCIAL-MICRO]  107.09,27.08 0 top
FD74  FIDUCIALUFIDUCIAL  [FIDUCIAL-MICRO]  107.09,27.08 0 bottom
FD75  FIDUCIALUFIDUCIAL  [FIDUCIAL-MICRO]  94.34,18.16 0 top
FD76  FIDUCIALUFIDUCIAL  [FIDUCIAL-MICRO]  94.34,18.16 0 bottom
FD77  FIDUCIALUFIDUCIAL  [FIDUCIAL-MICRO]  121.56,27.08 0 top
FD78  FIDUCIALUFIDUCIAL  [FIDUCIAL-MICRO]  121.56,27.08 0 bottom
FD79  FIDUCIALUFIDUCIAL  [FIDUCIAL-MICRO]  108.81,18.16 0 top
FD80  FIDUCIALUFIDUCIAL  [FIDUCIAL-MICRO]  108.81,18.16 0 bottom
FD81  FIDUCIALUFIDUCIAL  [FIDUCIAL-MICRO]  136.04,27.08 0 top
FD82  FIDUCIALUFIDUCIAL  [FIDUCIAL-MICRO]  136.04,27.08 0 bottom
FD83  FIDUCIALUFIDUCIAL  [FIDUCIAL-MICRO]  123.29,18.16 0 top
FD84  FIDUCIALUFIDUCIAL  [FIDUCIAL-MICRO]  123.29,18.16 0 bottom
FD85  FIDUCIALUFIDUCIAL  [FIDUCIAL-MICRO]  150.52,27.08 0 top
FD86  FIDUCIALUFIDUCIAL  [FIDUCIAL-MICRO]  150.52,27.08 0 bottom
FD87  FIDUCIALUFIDUCIAL  [FIDUCIAL-MICRO]  137.77,18.16 0 top
FD88  FIDUCIALUFIDUCIAL  [FIDUCIAL-MICRO]  137.77,18.16 0 bottom
FD89  FIDUCIALUFIDUCIAL  [FIDUCIAL-MICRO]  165,27.08 0 top
FD90  FIDUCIALUFIDUCIAL  [FIDUCIAL-MICRO]  165,27.08 0 bottom
FD91  FIDUCIALUFIDUCIAL  [FIDUCIAL-MICRO]  152.25,18.16 0 top
FD92  FIDUCIALUFIDUCIAL  [FIDUCIAL-MICRO]  152.25,18.16 0 bottom
FD93  FIDUCIALUFIDUCIAL  [FIDUCIAL-MICRO]  179.48,27.08 0 top
FD94  FIDUCIALUFIDUCIAL  [FIDUCIAL-MICRO]  179.48,27.08 0 bottom
FD95  FIDUCIALUFIDUCIAL  [FIDUCIAL-MICRO]  166.73,18.16 0 top
FD96  FIDUCIALUFIDUCIAL  [FIDUCIAL-MICRO]  166.73,18.16 0 bottom
FD97  FIDUCIALUFIDUCIAL  [FIDUCIAL-MICRO]  20.22,37.74 0 top
FD98  FIDUCIALUFIDUCIAL  [FIDUCIAL-MICRO]  20.22,37.74 0 bottom
FD99  FIDUCIALUFIDUCIAL  [FIDUCIAL-MICRO]  7.47,28.83 0 top
FD100  FIDUCIALUFIDUCIAL  [FIDUCIAL-MICRO]  7.47,28.83 0 bottom
FD101  FIDUCIALUFIDUCIAL  [FIDUCIAL-MICRO]  34.7,37.74 0 top
FD102  FIDUCIALUFIDUCIAL  [FIDUCIAL-MICRO]  34.7,37.74 0 bottom
FD103  FIDUCIALUFIDUCIAL  [FIDUCIAL-MICRO]  21.95,28.83 0 top
FD104  FIDUCIALUFIDUCIAL  [FIDUCIAL-MICRO]  21.95,28.83 0 bottom
FD105  FIDUCIALUFIDUCIAL  [FIDUCIAL-MICRO]  49.17,37.74 0 top
FD106  FIDUCIALUFIDUCIAL  [FIDUCIAL-MICRO]  49.17,37.74 0 bottom
FD107  FIDUCIALUFIDUCIAL  [FIDUCIAL-MICRO]  36.42,28.83 0 top
FD108  FIDUCIALUFIDUCIAL  [FIDUCIAL-MICRO]  36.42,28.83 0 bottom
FD109  FIDUCIALUFIDUCIAL  [FIDUCIAL-MICRO]  63.65,37.74 0 top
FD110  FIDUCIALUFIDUCIAL  [FIDUCIAL-MICRO]  63.65,37.74 0 bottom
FD111  FIDUCIALUFIDUCIAL  [FIDUCIAL-MICRO]  50.9,28.83 0 top
FD112  FIDUCIALUFIDUCIAL  [FIDUCIAL-MICRO]  50.9,28.83 0 bottom
FD113  FIDUCIALUFIDUCIAL  [FIDUCIAL-MICRO]  78.13,37.74 0 top
FD114  FIDUCIALUFIDUCIAL  [FIDUCIAL-MICRO]  78.13,37.74 0 bottom
FD115  FIDUCIALUFIDUCIAL  [FIDUCIAL-MICRO]  65.38,28.83 0 top
FD116  FIDUCIALUFIDUCIAL  [FIDUCIAL-MICRO]  65.38,28.83 0 bottom
FD117  FIDUCIALUFIDUCIAL  [FIDUCIAL-MICRO]  92.61,37.74 0 top
FD118  FIDUCIALUFIDUCIAL  [FIDUCIAL-MICRO]  92.61,37.74 0 bottom
FD119  FIDUCIALUFIDUCIAL  [FIDUCIAL-MICRO]  79.86,28.83 0 top
FD120  FIDUCIALUFIDUCIAL  [FIDUCIAL-MICRO]  79.86,28.83 0 bottom
FD121  FIDUCIALUFIDUCIAL  [FIDUCIAL-MICRO]  107.09,37.74 0 top
FD122  FIDUCIALUFIDUCIAL  [FIDUCIAL-MICRO]  107.09,37.74 0 bottom
FD123  FIDUCIALUFIDUCIAL  [FIDUCIAL-MICRO]  94.34,28.83 0 top
FD124  FIDUCIALUFIDUCIAL  [FIDUCIAL-MICRO]  94.34,28.83 0 bottom
FD125  FIDUCIALUFIDUCIAL  [FIDUCIAL-MICRO]  121.56,37.74 0 top
FD126  FIDUCIALUFIDUCIAL  [FIDUCIAL-MICRO]  121.56,37.74 0 bottom
FD127  FIDUCIALUFIDUCIAL  [FIDUCIAL-MICRO]  108.81,28.83 0 top
FD128  FIDUCIALUFIDUCIAL  [FIDUCIAL-MICRO]  108.81,28.83 0 bottom
FD129  FIDUCIALUFIDUCIAL  [FIDUCIAL-MICRO]  136.04,37.74 0 top
FD130  FIDUCIALUFIDUCIAL  [FIDUCIAL-MICRO]  136.04,37.74 0 bottom
FD131  FIDUCIALUFIDUCIAL  [FIDUCIAL-MICRO]  123.29,28.83 0 top
FD132  FIDUCIALUFIDUCIAL  [FIDUCIAL-MICRO]  123.29,28.83 0 bottom
FD133  FIDUCIALUFIDUCIAL  [FIDUCIAL-MICRO]  150.52,37.74 0 top
FD134  FIDUCIALUFIDUCIAL  [FIDUCIAL-MICRO]  150.52,37.74 0 bottom
FD135  FIDUCIALUFIDUCIAL  [FIDUCIAL-MICRO]  137.77,28.83 0 top
FD136  FIDUCIALUFIDUCIAL  [FIDUCIAL-MICRO]  137.77,28.83 0 bottom
FD137  FIDUCIALUFIDUCIAL  [FIDUCIAL-MICRO]  165,37.74 0 top
FD138  FIDUCIALUFIDUCIAL  [FIDUCIAL-MICRO]  165,37.74 0 bottom
FD139  FIDUCIALUFIDUCIAL  [FIDUCIAL-MICRO]  152.25,28.83 0 top
FD140  FIDUCIALUFIDUCIAL  [FIDUCIAL-MICRO]  152.25,28.83 0 bottom
FD141  FIDUCIALUFIDUCIAL  [FIDUCIAL-MICRO]  179.48,37.74 0 top
FD142  FIDUCIALUFIDUCIAL  [FIDUCIAL-MICRO]  179.48,37.74 0 bottom
FD143  FIDUCIALUFIDUCIAL  [FIDUCIAL-MICRO]  166.73,28.83 0 top
FD144  FIDUCIALUFIDUCIAL  [FIDUCIAL-MICRO]  166.73,28.83 0 bottom
FD145  FIDUCIALUFIDUCIAL  [FIDUCIAL-MICRO]  20.22,48.41 0 top
FD146  FIDUCIALUFIDUCIAL  [FIDUCIAL-MICRO]  20.22,48.41 0 bottom
FD147  FIDUCIALUFIDUCIAL  [FIDUCIAL-MICRO]  7.47,39.5 0 top
FD148  FIDUCIALUFIDUCIAL  [FIDUCIAL-MICRO]  7.47,39.5 0 bottom
FD149  FIDUCIALUFIDUCIAL  [FIDUCIAL-MICRO]  34.7,48.41 0 top
FD150  FIDUCIALUFIDUCIAL  [FIDUCIAL-MICRO]  34.7,48.41 0 bottom
FD151  FIDUCIALUFIDUCIAL  [FIDUCIAL-MICRO]  21.95,39.5 0 top
FD152  FIDUCIALUFIDUCIAL  [FIDUCIAL-MICRO]  21.95,39.5 0 bottom
FD153  FIDUCIALUFIDUCIAL  [FIDUCIAL-MICRO]  49.17,48.41 0 top
FD154  FIDUCIALUFIDUCIAL  [FIDUCIAL-MICRO]  49.17,48.41 0 bottom
FD155  FIDUCIALUFIDUCIAL  [FIDUCIAL-MICRO]  36.42,39.5 0 top
FD156  FIDUCIALUFIDUCIAL  [FIDUCIAL-MICRO]  36.42,39.5 0 bottom
FD157  FIDUCIALUFIDUCIAL  [FIDUCIAL-MICRO]  63.65,48.41 0 top
FD158  FIDUCIALUFIDUCIAL  [FIDUCIAL-MICRO]  63.65,48.41 0 bottom
FD159  FIDUCIALUFIDUCIAL  [FIDUCIAL-MICRO]  50.9,39.5 0 top
FD160  FIDUCIALUFIDUCIAL  [FIDUCIAL-MICRO]  50.9,39.5 0 bottom
FD161  FIDUCIALUFIDUCIAL  [FIDUCIAL-MICRO]  78.13,48.41 0 top
FD162  FIDUCIALUFIDUCIAL  [FIDUCIAL-MICRO]  78.13,48.41 0 bottom
FD163  FIDUCIALUFIDUCIAL  [FIDUCIAL-MICRO]  65.38,39.5 0 top
FD164  FIDUCIALUFIDUCIAL  [FIDUCIAL-MICRO]  65.38,39.5 0 bottom
FD165  FIDUCIALUFIDUCIAL  [FIDUCIAL-MICRO]  92.61,48.41 0 top
FD166  FIDUCIALUFIDUCIAL  [FIDUCIAL-MICRO]  92.61,48.41 0 bottom
FD167  FIDUCIALUFIDUCIAL  [FIDUCIAL-MICRO]  79.86,39.5 0 top
FD168  FIDUCIALUFIDUCIAL  [FIDUCIAL-MICRO]  79.86,39.5 0 bottom
FD169  FIDUCIALUFIDUCIAL  [FIDUCIAL-MICRO]  107.09,48.41 0 top
FD170  FIDUCIALUFIDUCIAL  [FIDUCIAL-MICRO]  107.09,48.41 0 bottom
FD171  FIDUCIALUFIDUCIAL  [FIDUCIAL-MICRO]  94.34,39.5 0 top
FD172  FIDUCIALUFIDUCIAL  [FIDUCIAL-MICRO]  94.34,39.5 0 bottom
FD173  FIDUCIALUFIDUCIAL  [FIDUCIAL-MICRO]  121.56,48.41 0 top
FD174  FIDUCIALUFIDUCIAL  [FIDUCIAL-MICRO]  121.56,48.41 0 bottom
FD175  FIDUCIALUFIDUCIAL  [FIDUCIAL-MICRO]  108.81,39.5 0 top
FD176  FIDUCIALUFIDUCIAL  [FIDUCIAL-MICRO]  108.81,39.5 0 bottom
FD177  FIDUCIALUFIDUCIAL  [FIDUCIAL-MICRO]  136.04,48.41 0 top
FD178  FIDUCIALUFIDUCIAL  [FIDUCIAL-MICRO]  136.04,48.41 0 bottom
FD179  FIDUCIALUFIDUCIAL  [FIDUCIAL-MICRO]  123.29,39.5 0 top
FD180  FIDUCIALUFIDUCIAL  [FIDUCIAL-MICRO]  123.29,39.5 0 bottom
FD181  FIDUCIALUFIDUCIAL  [FIDUCIAL-MICRO]  150.52,48.41 0 top
FD182  FIDUCIALUFIDUCIAL  [FIDUCIAL-MICRO]  150.52,48.41 0 bottom
FD183  FIDUCIALUFIDUCIAL  [FIDUCIAL-MICRO]  137.77,39.5 0 top
FD184  FIDUCIALUFIDUCIAL  [FIDUCIAL-MICRO]  137.77,39.5 0 bottom
FD185  FIDUCIALUFIDUCIAL  [FIDUCIAL-MICRO]  165,48.41 0 top
FD186  FIDUCIALUFIDUCIAL  [FIDUCIAL-MICRO]  165,48.41 0 bottom
FD187  FIDUCIALUFIDUCIAL  [FIDUCIAL-MICRO]  152.25,39.5 0 top
FD188  FIDUCIALUFIDUCIAL  [FIDUCIAL-MICRO]  152.25,39.5 0 bottom
FD189  FIDUCIALUFIDUCIAL  [FIDUCIAL-MICRO]  179.48,48.41 0 top
FD190  FIDUCIALUFIDUCIAL  [FIDUCIAL-MICRO]  179.48,48.41 0 bottom
FD191  FIDUCIALUFIDUCIAL  [FIDUCIAL-MICRO]  166.73,39.5 0 top
FD192  FIDUCIALUFIDUCIAL  [FIDUCIAL-MICRO]  166.73,39.5 0 bottom
FD193  FIDUCIALUFIDUCIAL  [FIDUCIAL-MICRO]  20.22,59.08 0 top
FD194  FIDUCIALUFIDUCIAL  [FIDUCIAL-MICRO]  20.22,59.08 0 bottom
FD195  FIDUCIALUFIDUCIAL  [FIDUCIAL-MICRO]  7.47,50.16 0 top
FD196  FIDUCIALUFIDUCIAL  [FIDUCIAL-MICRO]  7.47,50.16 0 bottom
FD197  FIDUCIALUFIDUCIAL  [FIDUCIAL-MICRO]  34.7,59.08 0 top
FD198  FIDUCIALUFIDUCIAL  [FIDUCIAL-MICRO]  34.7,59.08 0 bottom
FD199  FIDUCIALUFIDUCIAL  [FIDUCIAL-MICRO]  21.95,50.16 0 top
FD200  FIDUCIALUFIDUCIAL  [FIDUCIAL-MICRO]  21.95,50.16 0 bottom
FD201  FIDUCIALUFIDUCIAL  [FIDUCIAL-MICRO]  49.17,59.08 0 top
FD202  FIDUCIALUFIDUCIAL  [FIDUCIAL-MICRO]  49.17,59.08 0 bottom
FD203  FIDUCIALUFIDUCIAL  [FIDUCIAL-MICRO]  36.42,50.16 0 top
FD204  FIDUCIALUFIDUCIAL  [FIDUCIAL-MICRO]  36.42,50.16 0 bottom
FD205  FIDUCIALUFIDUCIAL  [FIDUCIAL-MICRO]  63.65,59.08 0 top
FD206  FIDUCIALUFIDUCIAL  [FIDUCIAL-MICRO]  63.65,59.08 0 bottom
FD207  FIDUCIALUFIDUCIAL  [FIDUCIAL-MICRO]  50.9,50.16 0 top
FD208  FIDUCIALUFIDUCIAL  [FIDUCIAL-MICRO]  50.9,50.16 0 bottom
FD209  FIDUCIALUFIDUCIAL  [FIDUCIAL-MICRO]  78.13,59.08 0 top
FD210  FIDUCIALUFIDUCIAL  [FIDUCIAL-MICRO]  78.13,59.08 0 bottom
FD211  FIDUCIALUFIDUCIAL  [FIDUCIAL-MICRO]  65.38,50.16 0 top
FD212  FIDUCIALUFIDUCIAL  [FIDUCIAL-MICRO]  65.38,50.16 0 bottom
FD213  FIDUCIALUFIDUCIAL  [FIDUCIAL-MICRO]  92.61,59.08 0 top
FD214  FIDUCIALUFIDUCIAL  [FIDUCIAL-MICRO]  92.61,59.08 0 bottom
FD215  FIDUCIALUFIDUCIAL  [FIDUCIAL-MICRO]  79.86,50.16 0 top
FD216  FIDUCIALUFIDUCIAL  [FIDUCIAL-MICRO]  79.86,50.16 0 bottom
FD217  FIDUCIALUFIDUCIAL  [FIDUCIAL-MICRO]  107.09,59.08 0 top
FD218  FIDUCIALUFIDUCIAL  [FIDUCIAL-MICRO]  107.09,59.08 0 bottom
FD219  FIDUCIALUFIDUCIAL  [FIDUCIAL-MICRO]  94.34,50.16 0 top
FD220  FIDUCIALUFIDUCIAL  [FIDUCIAL-MICRO]  94.34,50.16 0 bottom
FD221  FIDUCIALUFIDUCIAL  [FIDUCIAL-MICRO]  121.56,59.08 0 top
FD222  FIDUCIALUFIDUCIAL  [FIDUCIAL-MICRO]  121.56,59.08 0 bottom
FD223  FIDUCIALUFIDUCIAL  [FIDUCIAL-MICRO]  108.81,50.16 0 top
FD224  FIDUCIALUFIDUCIAL  [FIDUCIAL-MICRO]  108.81,50.16 0 bottom
FD225  FIDUCIALUFIDUCIAL  [FIDUCIAL-MICRO]  136.04,59.08 0 top
FD226  FIDUCIALUFIDUCIAL  [FIDUCIAL-MICRO]  136.04,59.08 0 bottom
FD227  FIDUCIALUFIDUCIAL  [FIDUCIAL-MICRO]  123.29,50.16 0 top
FD228  FIDUCIALUFIDUCIAL  [FIDUCIAL-MICRO]  123.29,50.16 0 bottom
FD229  FIDUCIALUFIDUCIAL  [FIDUCIAL-MICRO]  150.52,59.08 0 top
FD230  FIDUCIALUFIDUCIAL  [FIDUCIAL-MICRO]  150.52,59.08 0 bottom
FD231  FIDUCIALUFIDUCIAL  [FIDUCIAL-MICRO]  137.77,50.16 0 top
FD232  FIDUCIALUFIDUCIAL  [FIDUCIAL-MICRO]  137.77,50.16 0 bottom
FD233  FIDUCIALUFIDUCIAL  [FIDUCIAL-MICRO]  165,59.08 0 top
FD234  FIDUCIALUFIDUCIAL  [FIDUCIAL-MICRO]  165,59.08 0 bottom
FD235  FIDUCIALUFIDUCIAL  [FIDUCIAL-MICRO]  152.25,50.16 0 top
FD236  FIDUCIALUFIDUCIAL  [FIDUCIAL-MICRO]  152.25,50.16 0 bottom
FD237  FIDUCIALUFIDUCIAL  [FIDUCIAL-MICRO]  179.48,59.08 0 top
FD238  FIDUCIALUFIDUCIAL  [FIDUCIAL-MICRO]  179.48,59.08 0 bottom
FD239  FIDUCIALUFIDUCIAL  [FIDUCIAL-MICRO]  166.73,50.16 0 top
FD240  FIDUCIALUFIDUCIAL  [FIDUCIAL-MICRO]  166.73,50.16 0 bottom
FD241  FIDUCIALUFIDUCIAL  [FIDUCIAL-MICRO]  20.22,69.75 0 top
FD242  FIDUCIALUFIDUCIAL  [FIDUCIAL-MICRO]  20.22,69.75 0 bottom
FD243  FIDUCIALUFIDUCIAL  [FIDUCIAL-MICRO]  7.47,60.83 0 top
FD244  FIDUCIALUFIDUCIAL  [FIDUCIAL-MICRO]  7.47,60.83 0 bottom
FD245  FIDUCIALUFIDUCIAL  [FIDUCIAL-MICRO]  34.7,69.75 0 top
FD246  FIDUCIALUFIDUCIAL  [FIDUCIAL-MICRO]  34.7,69.75 0 bottom
FD247  FIDUCIALUFIDUCIAL  [FIDUCIAL-MICRO]  21.95,60.83 0 top
FD248  FIDUCIALUFIDUCIAL  [FIDUCIAL-MICRO]  21.95,60.83 0 bottom
FD249  FIDUCIALUFIDUCIAL  [FIDUCIAL-MICRO]  49.17,69.75 0 top
FD250  FIDUCIALUFIDUCIAL  [FIDUCIAL-MICRO]  49.17,69.75 0 bottom
FD251  FIDUCIALUFIDUCIAL  [FIDUCIAL-MICRO]  36.42,60.83 0 top
FD252  FIDUCIALUFIDUCIAL  [FIDUCIAL-MICRO]  36.42,60.83 0 bottom
FD253  FIDUCIALUFIDUCIAL  [FIDUCIAL-MICRO]  63.65,69.75 0 top
FD254  FIDUCIALUFIDUCIAL  [FIDUCIAL-MICRO]  63.65,69.75 0 bottom
FD255  FIDUCIALUFIDUCIAL  [FIDUCIAL-MICRO]  50.9,60.83 0 top
FD256  FIDUCIALUFIDUCIAL  [FIDUCIAL-MICRO]  50.9,60.83 0 bottom
FD257  FIDUCIALUFIDUCIAL  [FIDUCIAL-MICRO]  78.13,69.75 0 top
FD258  FIDUCIALUFIDUCIAL  [FIDUCIAL-MICRO]  78.13,69.75 0 bottom
FD259  FIDUCIALUFIDUCIAL  [FIDUCIAL-MICRO]  65.38,60.83 0 top
FD260  FIDUCIALUFIDUCIAL  [FIDUCIAL-MICRO]  65.38,60.83 0 bottom
FD261  FIDUCIALUFIDUCIAL  [FIDUCIAL-MICRO]  92.61,69.75 0 top
FD262  FIDUCIALUFIDUCIAL  [FIDUCIAL-MICRO]  92.61,69.75 0 bottom
FD263  FIDUCIALUFIDUCIAL  [FIDUCIAL-MICRO]  79.86,60.83 0 top
FD264  FIDUCIALUFIDUCIAL  [FIDUCIAL-MICRO]  79.86,60.83 0 bottom
FD265  FIDUCIALUFIDUCIAL  [FIDUCIAL-MICRO]  107.09,69.75 0 top
FD266  FIDUCIALUFIDUCIAL  [FIDUCIAL-MICRO]  107.09,69.75 0 bottom
FD267  FIDUCIALUFIDUCIAL  [FIDUCIAL-MICRO]  94.34,60.83 0 top
FD268  FIDUCIALUFIDUCIAL  [FIDUCIAL-MICRO]  94.34,60.83 0 bottom
FD269  FIDUCIALUFIDUCIAL  [FIDUCIAL-MICRO]  121.56,69.75 0 top
FD270  FIDUCIALUFIDUCIAL  [FIDUCIAL-MICRO]  121.56,69.75 0 bottom
FD271  FIDUCIALUFIDUCIAL  [FIDUCIAL-MICRO]  108.81,60.83 0 top
FD272  FIDUCIALUFIDUCIAL  [FIDUCIAL-MICRO]  108.81,60.83 0 bottom
FD273  FIDUCIALUFIDUCIAL  [FIDUCIAL-MICRO]  136.04,69.75 0 top
FD274  FIDUCIALUFIDUCIAL  [FIDUCIAL-MICRO]  136.04,69.75 0 bottom
FD275  FIDUCIALUFIDUCIAL  [FIDUCIAL-MICRO]  123.29,60.83 0 top
FD276  FIDUCIALUFIDUCIAL  [FIDUCIAL-MICRO]  123.29,60.83 0 bottom
FD277  FIDUCIALUFIDUCIAL  [FIDUCIAL-MICRO]  150.52,69.75 0 top
FD278  FIDUCIALUFIDUCIAL  [FIDUCIAL-MICRO]  150.52,69.75 0 bottom
FD279  FIDUCIALUFIDUCIAL  [FIDUCIAL-MICRO]  137.77,60.83 0 top
FD280  FIDUCIALUFIDUCIAL  [FIDUCIAL-MICRO]  137.77,60.83 0 bottom
FD281  FIDUCIALUFIDUCIAL  [FIDUCIAL-MICRO]  165,69.75 0 top
FD282  FIDUCIALUFIDUCIAL  [FIDUCIAL-MICRO]  165,69.75 0 bottom
FD283  FIDUCIALUFIDUCIAL  [FIDUCIAL-MICRO]  152.25,60.83 0 top
FD284  FIDUCIALUFIDUCIAL  [FIDUCIAL-MICRO]  152.25,60.83 0 bottom
FD285  FIDUCIALUFIDUCIAL  [FIDUCIAL-MICRO]  179.48,69.75 0 top
FD286  FIDUCIALUFIDUCIAL  [FIDUCIAL-MICRO]  179.48,69.75 0 bottom
FD287  FIDUCIALUFIDUCIAL  [FIDUCIAL-MICRO]  166.73,60.83 0 top
FD288  FIDUCIALUFIDUCIAL  [FIDUCIAL-MICRO]  166.73,60.83 0 bottom
FD289  FIDUCIALUFIDUCIAL  [FIDUCIAL-MICRO]  20.22,80.42 0 top
FD290  FIDUCIALUFIDUCIAL  [FIDUCIAL-MICRO]  20.22,80.42 0 bottom
FD291  FIDUCIALUFIDUCIAL  [FIDUCIAL-MICRO]  7.47,71.5 0 top
FD292  FIDUCIALUFIDUCIAL  [FIDUCIAL-MICRO]  7.47,71.5 0 bottom
FD293  FIDUCIALUFIDUCIAL  [FIDUCIAL-MICRO]  34.7,80.42 0 top
FD294  FIDUCIALUFIDUCIAL  [FIDUCIAL-MICRO]  34.7,80.42 0 bottom
FD295  FIDUCIALUFIDUCIAL  [FIDUCIAL-MICRO]  21.95,71.5 0 top
FD296  FIDUCIALUFIDUCIAL  [FIDUCIAL-MICRO]  21.95,71.5 0 bottom
FD297  FIDUCIALUFIDUCIAL  [FIDUCIAL-MICRO]  49.17,80.42 0 top
FD298  FIDUCIALUFIDUCIAL  [FIDUCIAL-MICRO]  49.17,80.42 0 bottom
FD299  FIDUCIALUFIDUCIAL  [FIDUCIAL-MICRO]  36.42,71.5 0 top
FD300  FIDUCIALUFIDUCIAL  [FIDUCIAL-MICRO]  36.42,71.5 0 bottom
FD301  FIDUCIALUFIDUCIAL  [FIDUCIAL-MICRO]  63.65,80.42 0 top
FD302  FIDUCIALUFIDUCIAL  [FIDUCIAL-MICRO]  63.65,80.42 0 bottom
FD303  FIDUCIALUFIDUCIAL  [FIDUCIAL-MICRO]  50.9,71.5 0 top
FD304  FIDUCIALUFIDUCIAL  [FIDUCIAL-MICRO]  50.9,71.5 0 bottom
FD305  FIDUCIALUFIDUCIAL  [FIDUCIAL-MICRO]  78.13,80.42 0 top
FD306  FIDUCIALUFIDUCIAL  [FIDUCIAL-MICRO]  78.13,80.42 0 bottom
FD307  FIDUCIALUFIDUCIAL  [FIDUCIAL-MICRO]  65.38,71.5 0 top
FD308  FIDUCIALUFIDUCIAL  [FIDUCIAL-MICRO]  65.38,71.5 0 bottom
FD309  FIDUCIALUFIDUCIAL  [FIDUCIAL-MICRO]  92.61,80.42 0 top
FD310  FIDUCIALUFIDUCIAL  [FIDUCIAL-MICRO]  92.61,80.42 0 bottom
FD311  FIDUCIALUFIDUCIAL  [FIDUCIAL-MICRO]  79.86,71.5 0 top
FD312  FIDUCIALUFIDUCIAL  [FIDUCIAL-MICRO]  79.86,71.5 0 bottom
FD313  FIDUCIALUFIDUCIAL  [FIDUCIAL-MICRO]  107.09,80.42 0 top
FD314  FIDUCIALUFIDUCIAL  [FIDUCIAL-MICRO]  107.09,80.42 0 bottom
FD315  FIDUCIALUFIDUCIAL  [FIDUCIAL-MICRO]  94.34,71.5 0 top
FD316  FIDUCIALUFIDUCIAL  [FIDUCIAL-MICRO]  94.34,71.5 0 bottom
FD317  FIDUCIALUFIDUCIAL  [FIDUCIAL-MICRO]  121.56,80.42 0 top
FD318  FIDUCIALUFIDUCIAL  [FIDUCIAL-MICRO]  121.56,80.42 0 bottom
FD319  FIDUCIALUFIDUCIAL  [FIDUCIAL-MICRO]  108.81,71.5 0 top
FD320  FIDUCIALUFIDUCIAL  [FIDUCIAL-MICRO]  108.81,71.5 0 bottom
FD321  FIDUCIALUFIDUCIAL  [FIDUCIAL-MICRO]  136.04,80.42 0 top
FD322  FIDUCIALUFIDUCIAL  [FIDUCIAL-MICRO]  136.04,80.42 0 bottom
FD323  FIDUCIALUFIDUCIAL  [FIDUCIAL-MICRO]  123.29,71.5 0 top
FD324  FIDUCIALUFIDUCIAL  [FIDUCIAL-MICRO]  123.29,71.5 0 bottom
FD325  FIDUCIALUFIDUCIAL  [FIDUCIAL-MICRO]  150.52,80.42 0 top
FD326  FIDUCIALUFIDUCIAL  [FIDUCIAL-MICRO]  150.52,80.42 0 bottom
FD327  FIDUCIALUFIDUCIAL  [FIDUCIAL-MICRO]  137.77,71.5 0 top
FD328  FIDUCIALUFIDUCIAL  [FIDUCIAL-MICRO]  137.77,71.5 0 bottom
FD329  FIDUCIALUFIDUCIAL  [FIDUCIAL-MICRO]  165,80.42 0 top
FD330  FIDUCIALUFIDUCIAL  [FIDUCIAL-MICRO]  165,80.42 0 bottom
FD331  FIDUCIALUFIDUCIAL  [FIDUCIAL-MICRO]  152.25,71.5 0 top
FD332  FIDUCIALUFIDUCIAL  [FIDUCIAL-MICRO]  152.25,71.5 0 bottom
FD333  FIDUCIALUFIDUCIAL  [FIDUCIAL-MICRO]  179.48,80.42 0 top
FD334  FIDUCIALUFIDUCIAL  [FIDUCIAL-MICRO]  179.48,80.42 0 bottom
FD335  FIDUCIALUFIDUCIAL  [FIDUCIAL-MICRO]  166.73,71.5 0 top
FD336  FIDUCIALUFIDUCIAL  [FIDUCIAL-MICRO]  166.73,71.5 0 bottom
FD337  FIDUCIALUFIDUCIAL  [FIDUCIAL-MICRO]  20.22,91.08 0 top
FD338  FIDUCIALUFIDUCIAL  [FIDUCIAL-MICRO]  20.22,91.08 0 bottom
FD339  FIDUCIALUFIDUCIAL  [FIDUCIAL-MICRO]  7.47,82.17 0 top
FD340  FIDUCIALUFIDUCIAL  [FIDUCIAL-MICRO]  7.47,82.17 0 bottom
FD341  FIDUCIALUFIDUCIAL  [FIDUCIAL-MICRO]  34.7,91.08 0 top
FD342  FIDUCIALUFIDUCIAL  [FIDUCIAL-MICRO]  34.7,91.08 0 bottom
FD343  FIDUCIALUFIDUCIAL  [FIDUCIAL-MICRO]  21.95,82.17 0 top
FD344  FIDUCIALUFIDUCIAL  [FIDUCIAL-MICRO]  21.95,82.17 0 bottom
FD345  FIDUCIALUFIDUCIAL  [FIDUCIAL-MICRO]  49.17,91.08 0 top
FD346  FIDUCIALUFIDUCIAL  [FIDUCIAL-MICRO]  49.17,91.08 0 bottom
FD347  FIDUCIALUFIDUCIAL  [FIDUCIAL-MICRO]  36.42,82.17 0 top
FD348  FIDUCIALUFIDUCIAL  [FIDUCIAL-MICRO]  36.42,82.17 0 bottom
FD349  FIDUCIALUFIDUCIAL  [FIDUCIAL-MICRO]  63.65,91.08 0 top
FD350  FIDUCIALUFIDUCIAL  [FIDUCIAL-MICRO]  63.65,91.08 0 bottom
FD351  FIDUCIALUFIDUCIAL  [FIDUCIAL-MICRO]  50.9,82.17 0 top
FD352  FIDUCIALUFIDUCIAL  [FIDUCIAL-MICRO]  50.9,82.17 0 bottom
FD353  FIDUCIALUFIDUCIAL  [FIDUCIAL-MICRO]  78.13,91.08 0 top
FD354  FIDUCIALUFIDUCIAL  [FIDUCIAL-MICRO]  78.13,91.08 0 bottom
FD355  FIDUCIALUFIDUCIAL  [FIDUCIAL-MICRO]  65.38,82.17 0 top
FD356  FIDUCIALUFIDUCIAL  [FIDUCIAL-MICRO]  65.38,82.17 0 bottom
FD357  FIDUCIALUFIDUCIAL  [FIDUCIAL-MICRO]  92.61,91.08 0 top
FD358  FIDUCIALUFIDUCIAL  [FIDUCIAL-MICRO]  92.61,91.08 0 bottom
FD359  FIDUCIALUFIDUCIAL  [FIDUCIAL-MICRO]  79.86,82.17 0 top
FD360  FIDUCIALUFIDUCIAL  [FIDUCIAL-MICRO]  79.86,82.17 0 bottom
FD361  FIDUCIALUFIDUCIAL  [FIDUCIAL-MICRO]  107.09,91.08 0 top
FD362  FIDUCIALUFIDUCIAL  [FIDUCIAL-MICRO]  107.09,91.08 0 bottom
FD363  FIDUCIALUFIDUCIAL  [FIDUCIAL-MICRO]  94.34,82.17 0 top
FD364  FIDUCIALUFIDUCIAL  [FIDUCIAL-MICRO]  94.34,82.17 0 bottom
FD365  FIDUCIALUFIDUCIAL  [FIDUCIAL-MICRO]  121.56,91.08 0 top
FD366  FIDUCIALUFIDUCIAL  [FIDUCIAL-MICRO]  121.56,91.08 0 bottom
FD367  FIDUCIALUFIDUCIAL  [FIDUCIAL-MICRO]  108.81,82.17 0 top
FD368  FIDUCIALUFIDUCIAL  [FIDUCIAL-MICRO]  108.81,82.17 0 bottom
FD369  FIDUCIALUFIDUCIAL  [FIDUCIAL-MICRO]  136.04,91.08 0 top
FD370  FIDUCIALUFIDUCIAL  [FIDUCIAL-MICRO]  136.04,91.08 0 bottom
FD371  FIDUCIALUFIDUCIAL  [FIDUCIAL-MICRO]  123.29,82.17 0 top
FD372  FIDUCIALUFIDUCIAL  [FIDUCIAL-MICRO]  123.29,82.17 0 bottom
FD373  FIDUCIALUFIDUCIAL  [FIDUCIAL-MICRO]  150.52,91.08 0 top
FD374  FIDUCIALUFIDUCIAL  [FIDUCIAL-MICRO]  150.52,91.08 0 bottom
FD375  FIDUCIALUFIDUCIAL  [FIDUCIAL-MICRO]  137.77,82.17 0 top
FD376  FIDUCIALUFIDUCIAL  [FIDUCIAL-MICRO]  137.77,82.17 0 bottom
FD377  FIDUCIALUFIDUCIAL  [FIDUCIAL-MICRO]  165,91.08 0 top
FD378  FIDUCIALUFIDUCIAL  [FIDUCIAL-MICRO]  165,91.08 0 bottom
FD379  FIDUCIALUFIDUCIAL  [FIDUCIAL-MICRO]  152.25,82.17 0 top
FD380  FIDUCIALUFIDUCIAL  [FIDUCIAL-MICRO]  152.25,82.17 0 bottom
FD381  FIDUCIALUFIDUCIAL  [FIDUCIAL-MICRO]  179.48,91.08 0 top
FD382  FIDUCIALUFIDUCIAL  [FIDUCIAL-MICRO]  179.48,91.08 0 bottom
FD383  FIDUCIALUFIDUCIAL  [FIDUCIAL-MICRO]  166.73,82.17 0 top
FD384  FIDUCIALUFIDUCIAL  [FIDUCIAL-MICRO]  166.73,82.17 0 bottom
FD385  FIDUCIALUFIDUCIAL  [FIDUCIAL-MICRO]  20.22,101.75 0 top
FD386  FIDUCIALUFIDUCIAL  [FIDUCIAL-MICRO]  20.22,101.75 0 bottom
FD387  FIDUCIALUFIDUCIAL  [FIDUCIAL-MICRO]  7.47,92.84 0 top
FD388  FIDUCIALUFIDUCIAL  [FIDUCIAL-MICRO]  7.47,92.84 0 bottom
FD389  FIDUCIALUFIDUCIAL  [FIDUCIAL-MICRO]  34.7,101.75 0 top
FD390  FIDUCIALUFIDUCIAL  [FIDUCIAL-MICRO]  34.7,101.75 0 bottom
FD391  FIDUCIALUFIDUCIAL  [FIDUCIAL-MICRO]  21.95,92.84 0 top
FD392  FIDUCIALUFIDUCIAL  [FIDUCIAL-MICRO]  21.95,92.84 0 bottom
FD393  FIDUCIALUFIDUCIAL  [FIDUCIAL-MICRO]  49.17,101.75 0 top
FD394  FIDUCIALUFIDUCIAL  [FIDUCIAL-MICRO]  49.17,101.75 0 bottom
FD395  FIDUCIALUFIDUCIAL  [FIDUCIAL-MICRO]  36.42,92.84 0 top
FD396  FIDUCIALUFIDUCIAL  [FIDUCIAL-MICRO]  36.42,92.84 0 bottom
FD397  FIDUCIALUFIDUCIAL  [FIDUCIAL-MICRO]  63.65,101.75 0 top
FD398  FIDUCIALUFIDUCIAL  [FIDUCIAL-MICRO]  63.65,101.75 0 bottom
FD399  FIDUCIALUFIDUCIAL  [FIDUCIAL-MICRO]  50.9,92.84 0 top
FD400  FIDUCIALUFIDUCIAL  [FIDUCIAL-MICRO]  50.9,92.84 0 bottom
FD401  FIDUCIALUFIDUCIAL  [FIDUCIAL-MICRO]  78.13,101.75 0 top
FD402  FIDUCIALUFIDUCIAL  [FIDUCIAL-MICRO]  78.13,101.75 0 bottom
FD403  FIDUCIALUFIDUCIAL  [FIDUCIAL-MICRO]  65.38,92.84 0 top
FD404  FIDUCIALUFIDUCIAL  [FIDUCIAL-MICRO]  65.38,92.84 0 bottom
FD405  FIDUCIALUFIDUCIAL  [FIDUCIAL-MICRO]  92.61,101.75 0 top
FD406  FIDUCIALUFIDUCIAL  [FIDUCIAL-MICRO]  92.61,101.75 0 bottom
FD407  FIDUCIALUFIDUCIAL  [FIDUCIAL-MICRO]  79.86,92.84 0 top
FD408  FIDUCIALUFIDUCIAL  [FIDUCIAL-MICRO]  79.86,92.84 0 bottom
FD409  FIDUCIALUFIDUCIAL  [FIDUCIAL-MICRO]  107.09,101.75 0 top
FD410  FIDUCIALUFIDUCIAL  [FIDUCIAL-MICRO]  107.09,101.75 0 bottom
FD411  FIDUCIALUFIDUCIAL  [FIDUCIAL-MICRO]  94.34,92.84 0 top
FD412  FIDUCIALUFIDUCIAL  [FIDUCIAL-MICRO]  94.34,92.84 0 bottom
FD413  FIDUCIALUFIDUCIAL  [FIDUCIAL-MICRO]  121.56,101.75 0 top
FD414  FIDUCIALUFIDUCIAL  [FIDUCIAL-MICRO]  121.56,101.75 0 bottom
FD415  FIDUCIALUFIDUCIAL  [FIDUCIAL-MICRO]  108.81,92.84 0 top
FD416  FIDUCIALUFIDUCIAL  [FIDUCIAL-MICRO]  108.81,92.84 0 bottom
FD417  FIDUCIALUFIDUCIAL  [FIDUCIAL-MICRO]  136.04,101.75 0 top
FD418  FIDUCIALUFIDUCIAL  [FIDUCIAL-MICRO]  136.04,101.75 0 bottom
FD419  FIDUCIALUFIDUCIAL  [FIDUCIAL-MICRO]  123.29,92.84 0 top
FD420  FIDUCIALUFIDUCIAL  [FIDUCIAL-MICRO]  123.29,92.84 0 bottom
FD421  FIDUCIALUFIDUCIAL  [FIDUCIAL-MICRO]  150.52,101.75 0 top
FD422  FIDUCIALUFIDUCIAL  [FIDUCIAL-MICRO]  150.52,101.75 0 bottom
FD423  FIDUCIALUFIDUCIAL  [FIDUCIAL-MICRO]  137.77,92.84 0 top
FD424  FIDUCIALUFIDUCIAL  [FIDUCIAL-MICRO]  137.77,92.84 0 bottom
FD425  FIDUCIALUFIDUCIAL  [FIDUCIAL-MICRO]  165,101.75 0 top
FD426  FIDUCIALUFIDUCIAL  [FIDUCIAL-MICRO]  165,101.75 0 bottom
FD427  FIDUCIALUFIDUCIAL  [FIDUCIAL-MICRO]  152.25,92.84 0 top
FD428  FIDUCIALUFIDUCIAL  [FIDUCIAL-MICRO]  152.25,92.84 0 bottom
FD429  FIDUCIALUFIDUCIAL  [FIDUCIAL-MICRO]  179.48,101.75 0 top
FD430  FIDUCIALUFIDUCIAL  [FIDUCIAL-MICRO]  179.48,101.75 0 bottom
FD431  FIDUCIALUFIDUCIAL  [FIDUCIAL-MICRO]  166.73,92.84 0 top
FD432  FIDUCIALUFIDUCIAL  [FIDUCIAL-MICRO]  166.73,92.84 0 bottom
FD433  FIDUCIALUFIDUCIAL  [FIDUCIAL-MICRO]  20.22,112.42 0 top
FD434  FIDUCIALUFIDUCIAL  [FIDUCIAL-MICRO]  20.22,112.42 0 bottom
FD435  FIDUCIALUFIDUCIAL  [FIDUCIAL-MICRO]  7.47,103.51 0 top
FD436  FIDUCIALUFIDUCIAL  [FIDUCIAL-MICRO]  7.47,103.51 0 bottom
FD437  FIDUCIALUFIDUCIAL  [FIDUCIAL-MICRO]  34.7,112.42 0 top
FD438  FIDUCIALUFIDUCIAL  [FIDUCIAL-MICRO]  34.7,112.42 0 bottom
FD439  FIDUCIALUFIDUCIAL  [FIDUCIAL-MICRO]  21.95,103.51 0 top
FD440  FIDUCIALUFIDUCIAL  [FIDUCIAL-MICRO]  21.95,103.51 0 bottom
FD441  FIDUCIALUFIDUCIAL  [FIDUCIAL-MICRO]  49.17,112.42 0 top
FD442  FIDUCIALUFIDUCIAL  [FIDUCIAL-MICRO]  49.17,112.42 0 bottom
FD443  FIDUCIALUFIDUCIAL  [FIDUCIAL-MICRO]  36.42,103.51 0 top
FD444  FIDUCIALUFIDUCIAL  [FIDUCIAL-MICRO]  36.42,103.51 0 bottom
FD445  FIDUCIALUFIDUCIAL  [FIDUCIAL-MICRO]  63.65,112.42 0 top
FD446  FIDUCIALUFIDUCIAL  [FIDUCIAL-MICRO]  63.65,112.42 0 bottom
FD447  FIDUCIALUFIDUCIAL  [FIDUCIAL-MICRO]  50.9,103.51 0 top
FD448  FIDUCIALUFIDUCIAL  [FIDUCIAL-MICRO]  50.9,103.51 0 bottom
FD449  FIDUCIALUFIDUCIAL  [FIDUCIAL-MICRO]  78.13,112.42 0 top
FD450  FIDUCIALUFIDUCIAL  [FIDUCIAL-MICRO]  78.13,112.42 0 bottom
FD451  FIDUCIALUFIDUCIAL  [FIDUCIAL-MICRO]  65.38,103.51 0 top
FD452  FIDUCIALUFIDUCIAL  [FIDUCIAL-MICRO]  65.38,103.51 0 bottom
FD453  FIDUCIALUFIDUCIAL  [FIDUCIAL-MICRO]  92.61,112.42 0 top
FD454  FIDUCIALUFIDUCIAL  [FIDUCIAL-MICRO]  92.61,112.42 0 bottom
FD455  FIDUCIALUFIDUCIAL  [FIDUCIAL-MICRO]  79.86,103.51 0 top
FD456  FIDUCIALUFIDUCIAL  [FIDUCIAL-MICRO]  79.86,103.51 0 bottom
FD457  FIDUCIALUFIDUCIAL  [FIDUCIAL-MICRO]  107.09,112.42 0 top